# Altium PCB 在线升级仪_定制转接板V1.1_20231208(1).PcbDoc (part 1 of 2)
Units mil, origin at the board's own origin, x right, y up, seen from the top; angles counter-clockwise.
Board outline 6299.21 x 2165.35 mil, 2 copper layers (Top Layer, Bottom Layer); 38 components, 64 nets, 286 pads, 90 vias.
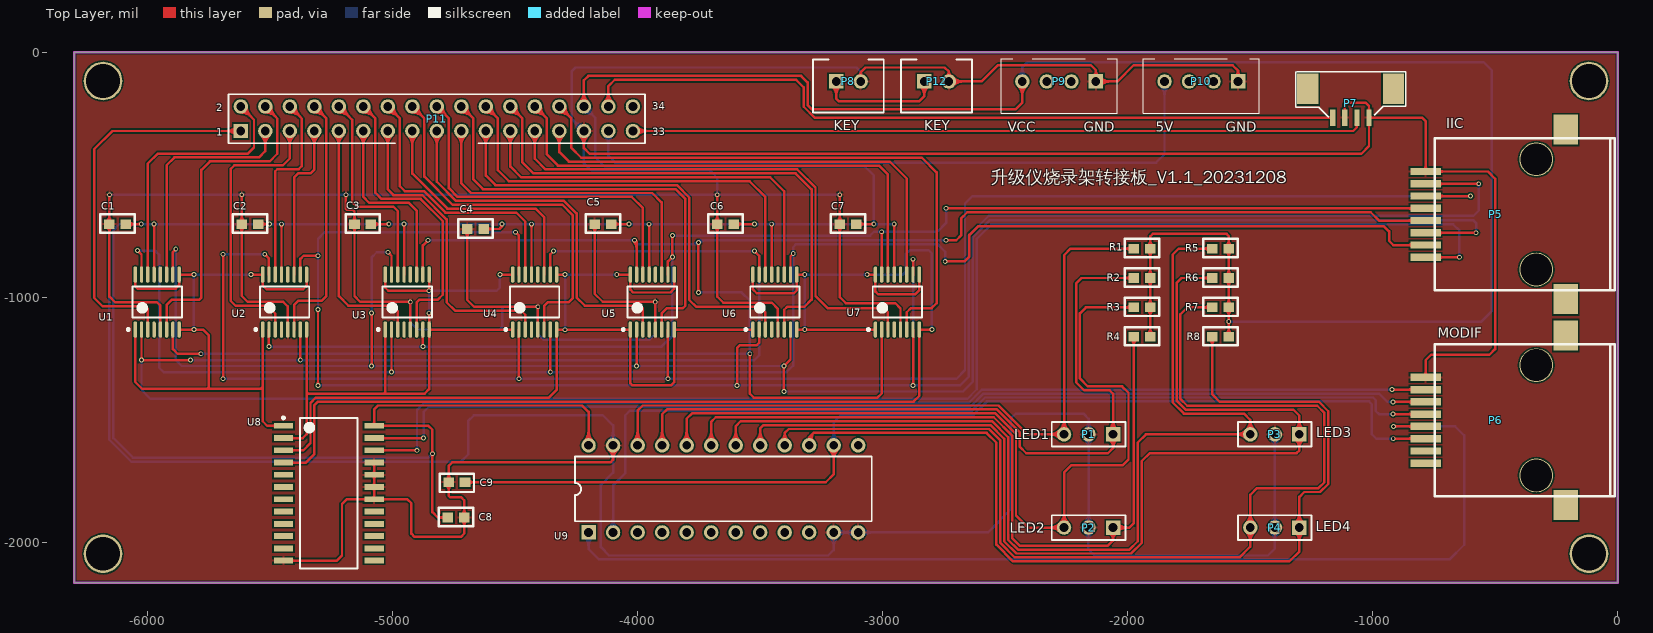
[diagram p0: Top Layer view]
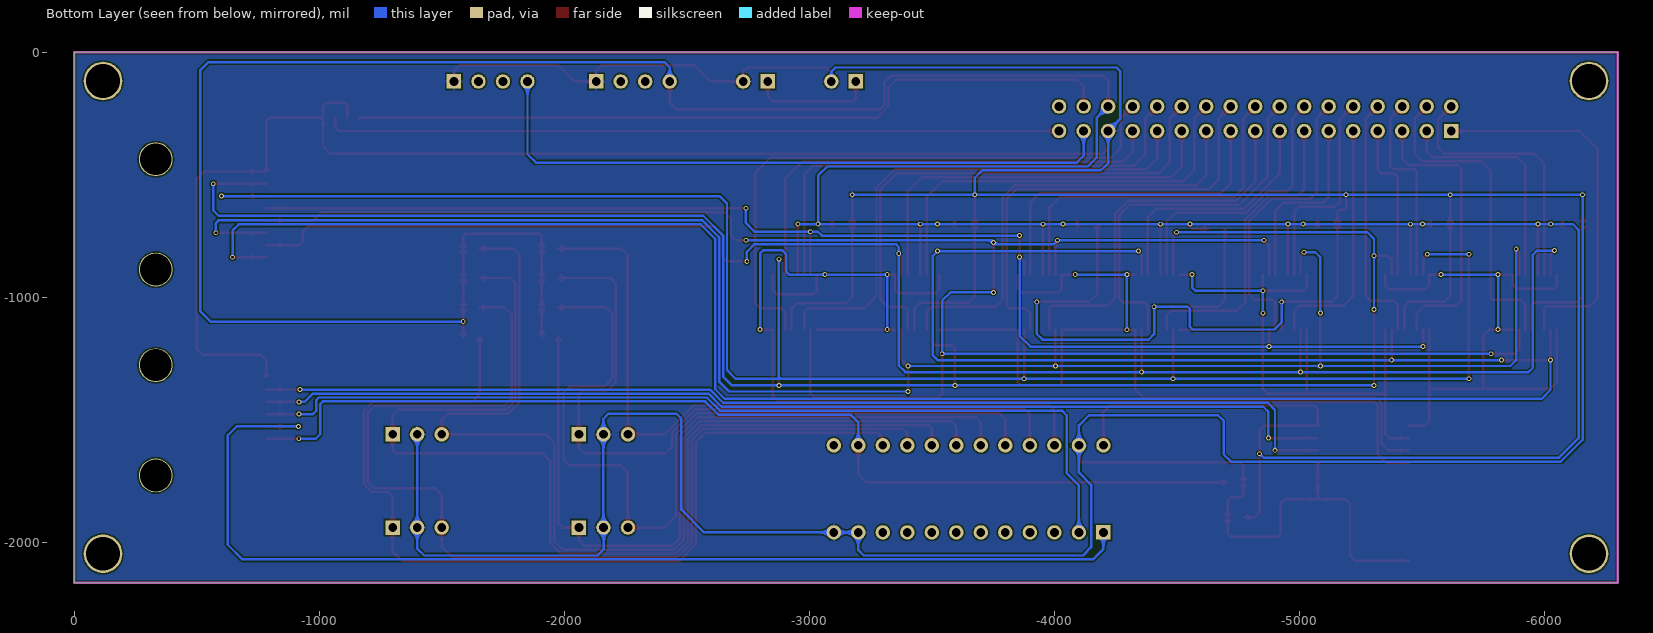
[diagram p1: Bottom Layer view, seen from below]

## Layer stack, top to bottom
Top Layer: signal copper 1.4
Dielectric: dielectric 12.6, FR-4, Dk 4.8
Bottom Layer: signal copper 1.4

## Board outline
-6299.21,-2165.35 -6299.21,0 0,0 0,-2165.35

## Design rules (kind name [scope] priority, off if disabled: settings)
Clearance [All] p1: gap=6
HoleSize [All] p1: absolutevalues=TRUE maxlimit=500 minlimit=1 maxpercent=80.000 minpercent=20.000
MinimumSolderMaskSliver [All] p1: minsoldermaskwidth=0
PolygonConnect [All] p1: connectstyle=Relief reliefconductorwidth=10 reliefentries=4 polygonreliefangle="90 Angle"
RoutingVias [All] p1: holewidth=11.81 width=19.68 viastyle="Through Hole" minholewidth=11.81 minwidth=19.68 maxholewidth=19.68 maxwidth=31.5
SilkscreenOverComponentPads [All] p1: minsilkscreentomaskgap=0
SolderMaskExpansion [All] p1: expansion=4
Width [All] p1: maxlimit=10 minlimit=6 preferedwidth=10
25 further rules are at their usual default settings.

## Components (designator, comment, footprint, x,y, rotation, side; value= is the part's Value field where it differs from the comment)
C1 "Cap" 0603 -6120,-700 r0 top
C2 "Cap" 0603 -5580,-700 r0 top
C3 "Cap" 0603 -5120,-700 r0 top
C4 "Cap" 0603 -4660,-720 r0 top
C5 "Cap" 0603 -4140,-700 r0 top
C6 "Cap" 0603 -3640,-700 r0 top
C7 "Cap" 0603 -3140,-700 r0 top
C8 "Cap Semi" 0603 -4739,-1897 r0 top
C9 "Cap Semi" 0603 -4739,-1757 r180 top
P1 "Header 3" HDR1X3 -2060,-1560 r180 top
P2 "Header 3" HDR1X3 -2060,-1940 r180 top
P3 "Header 3" HDR1X3 -1300,-1560 r180 top
P4 "Header 3" HDR1X3 -1300,-1940 r180 top
P5 "IIC" RJ45网络插座 -440,-660 r270 top
P6 "MODIF" RJ45网络插座 -440,-1500 r270 top
P7 "Header 4" 4pin_1.25mm -1100,-160 r90 top
P8 "升级头备用按键连接口" 2P座子 -3140,-120 r180 top
P9 "Header 4" 4P座子 -2280,-120 r180 top
P10 "Header 4" 4P座子 -1700,-120 r180 top
P11 "34P牛角座" "34P 牛角座" -4080,-280 r0 top
P12 "升级头备用按键连接口" 2P座子 -2780,-120 r180 top
R1 "Res1" 0603 -1940,-800 r0 top
R2 "Res1" 0603 -1940,-920 r0 top
R3 "Res1" 0603 -1940,-1040 r0 top
R4 "Res1" 0603 -1940,-1160 r0 top
R5 "Res1" 0603 -1620,-800 r0 top
R6 "Res1" 0603 -1620,-920 r0 top
R7 "Res1" 0603 -1620,-1040 r0 top
R8 "Res1" 0603 -1620,-1160 r0 top
U1 "TMUX1111" TMUX1111 -5960,-1020 r90 top
U2 "TMUX1111" TMUX1111 -5440,-1020 r90 top
U3 "TMUX1111" TMUX1111 -4940,-1020 r90 top
U4 "TMUX1111" TMUX1111 -4420,-1020 r90 top
U5 "TMUX1111" TMUX1111 -3940,-1020 r90 top
U6 "TMUX1111" TMUX1111 -3440,-1020 r90 top
U7 "TMUX1111" TMUX1111 -2940,-1020 r90 top
U8 "CD74HC154M" CD74HC154M -5260,-1800 r180 top
U9 "SN74ALS867ANT" SN74ALS867ANT -4200,-1960 r90 top

## Footprints (in the part's own frame and the unit in brackets; to place one, negate y for a bottom-side part, rotate by r counter-clockwise, add the part's x,y. Pads: shape width x height; smd on the part's side, far side on the other; paste and mask are expansions set on the pad)
2P座子 [mm]
  rect 1.5x1.5 hole 0.9: 1(1.27,0)
  round 1.5 hole 0.9: 2(-1.27,0)
  silkscreen extent -3.67,-2.27 3.67,3.2
4pin_1.25mm [mm] "贴片"
  rect 3.2x2.2 smd: 0(0.261,4.202) 0(0.261,-4.688)
  rect 1.7x0.54 smd: 1(-2.724,1.613) 2(-2.724,0.362) 3(-2.724,-0.889) 4(-2.724,-2.14)
  silkscreen extent -2.68,-5.97 2.03,5.46
4P座子 [mm]
  round 1.5 hole 0.9: 1(3.81,0) 2(1.27,0) 3(-1.27,0)
  rect 1.5x1.5 hole 0.9: 4(-3.81,0)
  silkscreen extent -6.01,-2.35 6.01,3.3
"34P 牛角座" [mm]
  rect 1.5x1.5 hole 0.9: 1(-39.089,-1.069)
  round 1.5 hole 0.9: 2(-39.089,1.471) 3(-36.549,-1.069) 4(-36.549,1.471) 5(-34.009,-1.069) 6(-34.009,1.471) 7(-31.469,-1.069) 8(-31.469,1.471) 9(-28.929,-1.069) 10(-28.929,1.471) 11(-26.389,-1.069) 12(-26.389,1.471) 13(-23.849,-1.069) 14(-23.849,1.471) 15(-21.309,-1.069) 16(-21.309,1.471) 17(-18.769,-1.069) 18(-18.769,1.471) 19(-16.229,-1.069) 20(-16.229,1.471) 21(-13.689,-1.069) 22(-13.689,1.471) 23(-11.149,-1.069) 24(-11.149,1.471) 25(-8.609,-1.069) 26(-8.609,1.471) 27(-6.069,-1.069) 28(-6.069,1.471) 29(-3.529,-1.069) 30(-3.529,1.471) 31(-0.989,-1.069) 32(-0.989,1.471) 33(1.551,-1.069) 34(1.551,1.471)
  silkscreen extent -40.36,-2.34 2.82,2.74
0603 [mm]
  rect 1.1x1 smd: 1(0.811,-0.048) 2(-0.889,-0.048)
  silkscreen extent -1.82,-0.94 1.74,0.97
CD74HC154M [mm] "SOP24"
  rect 2x0.6 smd: 1(4.701,-6.985) 2(4.701,-5.715) 3(4.701,-4.445) 4(4.701,-3.175) 5(4.701,-1.905) 6(4.701,-0.635) 7(4.701,0.635) 8(4.701,1.905) 9(4.701,3.175) 10(4.701,4.445) 11(4.701,5.715) 12(4.701,6.985) 13(-4.699,6.985) 14(-4.699,5.715) 15(-4.699,4.445) 16(-4.699,3.175) 17(-4.699,1.905) 18(-4.699,0.635) 19(-4.699,-0.635) 20(-4.699,-1.905) 21(-4.699,-3.175) 22(-4.699,-4.445) 23(-4.699,-5.715) 24(-4.699,-6.985)
  silkscreen extent -3,-7.93 4.83,7.8, body extent -3.8,-7.8 3.8,7.8, height 2.65
HDR1X3 [mm] "Connector; Header; 3 Position"
  rect 1.5x1.5 hole 0.9: 1(0,0)
  round 1.5 hole 0.9: 2(2.54,0) 3(5.08,0)
  silkscreen extent -1.27,-1.27 6.35,1.27
RJ45网络插座 [mm] "贴片8P"
  rect 3.12x2.54 smd: 0(-8.724,5.766) 0(8.846,5.766)
  round 3.5 hole 3.3: 0(-5.654,2.716) 0(5.776,2.716)
  rect 0.76x3.18 smd: 1(4.506,-8.754) 2(3.236,-8.754) 3(1.966,-8.754) 4(0.696,-8.754) 5(-0.574,-8.754) 6(-1.844,-8.754) 7(-3.114,-8.754) 8(-4.384,-8.754)
  silkscreen extent -7.81,-7.8 7.93,10.85
SN74ALS867ANT [mm]
  rect 1.5x1.5 hole 0.9: 1(0,0)
  round 1.5 hole 0.9: 2(0,-2.54) 3(0,-5.08) 4(0,-7.62) 5(0,-10.16) 6(0,-12.7) 7(0,-15.24) 8(0,-17.78) 9(0,-20.32) 10(0,-22.86) 11(0,-25.4) 12(0,-27.94) 13(9.02,-27.94) 14(9.02,-25.4) 15(9.02,-22.86) 16(9.02,-20.32) 17(9.02,-17.78) 18(9.02,-15.24) 19(9.02,-12.7) 20(9.02,-10.16) 21(9.02,-7.62) 22(9.02,-5.08) 23(9.02,-2.54) 24(9.02,0)
  silkscreen extent 1.16,-29.35 7.87,1.41
TMUX1111 [mm] "TSSOP-16"
  oval 1.7x0.35 smd: 1(-2.85,2.275) 2(-2.85,1.625) 3(-2.85,0.975) 4(-2.85,0.325) 5(-2.85,-0.325) 6(-2.85,-0.975) 7(-2.85,-1.625) 8(-2.85,-2.275) 9(2.85,-2.275) 10(2.85,-1.625) 11(2.85,-0.975) 12(2.85,-0.325) 13(2.85,0.325) 14(2.85,0.975) 15(2.85,1.625) 16(2.85,2.275)
  silkscreen extent -2.97,-2.55 1.6,3.12, body extent -2.25,-2.55 2.25,2.55, height 1.2

## Part data
C1 C2 C3 C4 C5 C6 C7: "Capacitor"
C8 C9: "Capacitor (Semiconductor SIM Model)"
P1 P2 P3 P4: "Header, 3-Pin"
P5 P6: library part "Header 8", "Header, 8-Pin"
P7 P9 P10: "Header, 4-Pin"
P8 P12: library part "Header 2", "Header, 2-Pin"
P11: library part "Header 17X2A", "Header, 17-Pin, Dual row"
R1 R2 R3 R4 R5 R6 R7 R8: "Resistor"
U1 U2 U3 U4 U5 U6 U7: library part Component_3
U8: "High Speed CMOS Logic 4-to-16 Line Decoder/Demultiplexer"
U9: library part Component_2

## Free pads (board coordinates)
  round 157.48 hole 137.8: 1(-6181.1,-2047.24) 1(-6181.1,-118.11) 1(-118.11,-2047.24) 1(-118.11,-118.11)

## Via types
v1: diameter 19.68, hole 11.81, Top Layer to Bottom Layer, 90 vias

## Nets (pads, with @x,y where several pads share a name; then routed paths per layer and width w, separated by ;. In a path a pad name is that pad's centre, name@x,y a point inside that pad or via, vN(x,y) a via of type N, cw(c..) or ccw(c..) an arc to the next point about the centre after c; other vN are vias at no path point)
5V: P10.1 P11.31 | length 2988.8
  Bottom Layer w10: P11.31@-4136.28,-339.43 cw(c-4178.15,-381.3) -4118.93,-381.3 cw(c-4059.72,-381.3) P11.31@-4101.59,-339.43 ; P11.31@-4129.21,-332.36 cw(c-4154.01,-357.16) -4118.93,-357.16 cw(c-4083.86,-357.16) P11.31@-4108.66,-332.36 ; P11.31@-4118.93,-322.08 -4118.93,-423.07 -4091,-451 -1884,-451 -1850,-417 P10.1@-1850,-120 ; P10.1@-1867.34,-137.34 cw(c-1909.21,-179.21) -1850,-179.21 cw(c-1790.79,-179.21) P10.1@-1832.66,-137.34 ; P10.1@-1860.27,-130.27 cw(c-1885.07,-155.07) -1850,-155.07 cw(c-1814.93,-155.07) P10.1@-1839.73,-130.27
AVDD: P6.1
CLK1: P6.2
GND: C1.2 C2.2 C3.2 C4.2 C5.2 C6.2 C7.2 C8.1 C9.1 P1.2 P2.2 P3.2 P4.2 P5.8 P6.8 P7.2 P7.4 P8.2 P9.4 P10.4 P11.29 P12.2 U1.5 U2.5 U3.5 U4.5 U5.5 U6.5 U7.5 U8.12 U8.18 U8.19 U8.20 U8.21 U9.11 U9.12 U9.23 | length 34263.1
  Top Layer w10: C1.2@-6165.38,-712.28 cw(c-6190.45,-737.35) -6155,-737.35 cw(c-6119.55,-737.35) C1.2@-6144.62,-712.28 ; C1.2@-6165.38,-691.51 ccw(c-6190.45,-666.45) -6155,-666.45 ccw(c-6119.55,-666.45) C1.2@-6144.62,-691.51 ; v1@-6158.42,-585.42 cw(c-6166.69,-593.69) -6155,-593.69 cw(c-6143.31,-593.69) v1@-6151.58,-585.42 ; v1(-6155,-582) C1.2@-6155,-701.9 -6155,-998 -6132,-1021 -5961,-1021 -5947.2,-1034.8 U1.5@-5947.2,-1132.2 ; C2.2@-5625.38,-712.28 cw(c-5650.45,-737.35) -5615,-737.35 cw(c-5579.55,-737.35) C2.2@-5604.62,-712.28 ; C2.2@-5625.38,-691.51 ccw(c-5650.45,-666.45) -5615,-666.45 ccw(c-5579.55,-666.45) C2.2@-5604.62,-691.51 ; v1@-5618.42,-585.42 cw(c-5626.69,-593.69) -5615,-593.69 cw(c-5603.31,-593.69) v1@-5611.58,-585.42 ; v1(-5615,-582) C2.2@-5615,-701.9 -5615,-995 -5591,-1019 -5446,-1019 -5427.2,-1037.8 U2.5@-5427.2,-1132.2 ; U8.12@-5445.08,-2075 -5227,-2075 -5206,-2054 -5206,-1844 -5187,-1825 U8.18@-5075,-1825 ; U8.12@-5412.7,-2079.82 cw(c-5401.08,-2091.44) -5401.08,-2075 cw(c-5401.08,-2058.56) U8.12@-5412.7,-2070.18 ; v1@-5193.42,-585.42 cw(c-5201.69,-593.69) -5190,-593.69 cw(c-5178.31,-593.69) v1@-5186.58,-585.42 ; v1(-5190,-582) -5190,-639 -5185,-644 -5162,-644 -5155,-651 C3.2@-5155,-701.9 -5155,-996 -5132,-1019 v1(-4927.2,-1019) U3.5@-4927.2,-1132.2 ; C3.2@-5165.38,-712.28 cw(c-5190.45,-737.35) -5155,-737.35 cw(c-5119.55,-737.35) C3.2@-5144.62,-712.28 ; C3.2@-5165.38,-691.51 ccw(c-5190.45,-666.45) -5155,-666.45 ccw(c-5119.55,-666.45) C3.2@-5144.62,-691.51 ; U8.18@-5107.38,-1829.82 ccw(c-5119,-1841.44) -5119,-1825 ccw(c-5119,-1808.56) U8.18@-5107.38,-1820.18 ; U8.18@-5079.82,-1820.18 ccw(c-5091.44,-1808.56) -5075,-1808.56 ccw(c-5058.56,-1808.56) U8.18@-5070.18,-1820.18 ; U8.19@-5079.82,-1779.82 cw(c-5091.44,-1791.44) -5075,-1791.44 cw(c-5058.56,-1791.44) U8.19@-5070.18,-1779.82 ; U8.19@-5079.82,-1770.18 ccw(c-5091.44,-1758.56) -5075,-1758.56 ccw(c-5058.56,-1758.56) U8.19@-5070.18,-1770.18 ; U8.20@-5079.82,-1729.82 cw(c-5091.44,-1741.44) -5075,-1741.44 cw(c-5058.56,-1741.44) U8.20@-5070.18,-1729.82 ; U8.20@-5079.82,-1720.18 ccw(c-5091.44,-1708.56) -5075,-1708.56 ccw(c-5058.56,-1708.56) U8.20@-5070.18,-1720.18 ; U8.21@-5079.82,-1679.82 cw(c-5091.44,-1691.44) -5075,-1691.44 cw(c-5058.56,-1691.44) U8.21@-5070.18,-1679.82 ; U8.21@-5075,-1675 U8.20@-5075,-1725 U8.19@-5075,-1775 U8.18@-5075,-1825 ; U8.18@-5042.62,-1829.82 cw(c-5031,-1841.44) -5031,-1825 cw(c-5031,-1808.56) U8.18@-5042.62,-1820.18 ; v1@-4930.63,-1015.58 cw(c-4938.9,-1007.31) -4938.9,-1019 cw(c-4938.9,-1030.69) -4930.63,-1022.42 cw(c-4938.9,-1030.69) -4927.2,-1030.69 cw(c-4915.51,-1030.69) v1@-4923.78,-1022.42 ; C9.1@-4781.31,-1765.49 cw(c-4806.38,-1790.55) -4770.93,-1790.55 cw(c-4735.48,-1790.55) C9.1@-4760.55,-1765.49 ; C9.1@-4781.31,-1744.72 ccw(c-4806.38,-1719.65) -4770.93,-1719.65 ccw(c-4735.48,-1719.65) C9.1@-4760.55,-1744.72 ; C8.1@-4717.45,-1909.28 cw(c-4742.52,-1934.35) -4707.07,-1934.35 cw(c-4671.62,-1934.35) C8.1@-4696.69,-1909.28 ; C8.1@-4717.45,-1888.51 ccw(c-4742.52,-1863.45) -4707.07,-1863.45 ccw(c-4671.62,-1863.45) C8.1@-4696.69,-1888.51 ; C4.2@-4705.38,-732.28 cw(c-4730.45,-757.35) -4695,-757.35 cw(c-4659.55,-757.35) C4.2@-4684.62,-732.28 ; C4.2@-4695,-721.9 -4695,-1011 -4667,-1039 -4407.2,-1039 U4.5@-4407.2,-1132.2 ; v1@-4410.42,-1035.58 cw(c-4418.69,-1027.31) -4418.69,-1039 cw(c-4418.69,-1050.69) -4410.42,-1042.42 cw(c-4418.2,-1050.2) -4407.2,-1050.2 ; -4407.2,-1051.18 cw(c-4394.81,-1051.18) v1@-4403.58,-1042.42 ; P11.29@-4236.28,-339.43 cw(c-4278.15,-381.3) -4218.93,-381.3 cw(c-4159.72,-381.3) P11.29@-4201.59,-339.43 ; P11.29@-4229.21,-332.36 cw(c-4254.01,-357.16) -4218.93,-357.16 cw(c-4183.86,-357.16) P11.29@-4208.66,-332.36 ; P11.29@-4218.93,-322.08 -4218.93,-392.07 -4196,-415 -1047,-415 -1015.74,-383.74 P7.4@-1015.74,-267.23 ; C5.2@-4185.38,-712.28 cw(c-4210.45,-737.35) -4175,-737.35 cw(c-4139.55,-737.35) C5.2@-4164.62,-712.28 ; C5.2@-4175,-701.9 -4175,-986 -4142,-1019 v1(-3928,-1019) -3928,-1131.41 U5.5@-3927.2,-1132.2 ; U9.23@-4117.11,-1622.46 cw(c-4156.59,-1663) -4100,-1663 ; U9.23@-4110.13,-1615.29 cw(c-4133.52,-1639.3) -4100,-1639.3 cw(c-4066.48,-1639.3) U9.23@-4089.87,-1615.29 ; U9.23@-4100,-1604.88 -4100,-1663 ; U9.23@-4082.89,-1622.46 ccw(c-4043.41,-1663) -4100,-1663 ; v1@-3931.42,-1015.58 cw(c-3939.69,-1007.31) -3939.69,-1019 cw(c-3939.69,-1030.69) -3931.42,-1022.42 cw(c-3939.69,-1030.69) -3928,-1030.69 cw(c-3916.31,-1030.69) v1@-3924.58,-1022.42 ; C6.2@-3685.38,-712.28 cw(c-3710.45,-737.35) -3675,-737.35 cw(c-3639.55,-737.35) C6.2@-3664.62,-712.28 ; C6.2@-3685.38,-691.51 ccw(c-3710.45,-666.45) -3675,-666.45 ccw(c-3639.55,-666.45) C6.2@-3664.62,-691.51 ; v1@-3678.42,-585.42 cw(c-3686.69,-593.69) -3675,-593.69 cw(c-3663.31,-593.69) v1@-3671.58,-585.42 ; v1(-3675,-582) C6.2@-3675,-701.9 -3675,-848 -3675,-998 -3650,-1023 -3452,-1023 -3427.2,-1047.8 U6.5@-3427.2,-1132.2 ; C7.2@-3185.38,-712.28 cw(c-3210.45,-737.35) -3175,-737.35 cw(c-3139.55,-737.35) C7.2@-3164.62,-712.28 ; C7.2@-3185.38,-691.51 ccw(c-3210.45,-666.45) -3175,-666.45 ccw(c-3139.55,-666.45) C7.2@-3164.62,-691.51 ; v1@-3178.42,-585.42 cw(c-3186.69,-593.69) -3175,-593.69 cw(c-3163.31,-593.69) v1@-3171.58,-585.42 ; v1(-3175,-582) C7.2@-3175,-701.9 -3175,-1000 -3150,-1025 -2948,-1025 -2927.2,-1045.8 U7.5@-2927.2,-1132.2 ; P8.2@-3099.55,-97.41 ccw(c-3105.64,-83) -3090,-83 ; P8.2@-3090,-120 -3090,-83 ; P8.2@-3080.45,-97.41 cw(c-3074.36,-83) -3090,-83 ; P12.2@-2741.12,-98.14 ccw(c-2750.35,-80) -2730,-80 ; P12.2@-2719.73,-130.27 cw(c-2694.93,-155.07) -2694.93,-120 cw(c-2694.93,-84.93) P12.2@-2719.73,-109.73 ; P12.2@-2718.88,-98.14 cw(c-2709.65,-80) -2730,-80 ; P12.2@-2712.66,-137.34 cw(c-2670.79,-179.21) -2670.79,-120 cw(c-2670.79,-60.79) P12.2@-2712.66,-102.66 ; P9.4@-2143.67,-99.63 ccw(c-2160.87,-74) -2130,-74 ; P9.4@-2119.73,-130.27 cw(c-2094.93,-155.07) -2094.93,-120 cw(c-2094.93,-84.93) P9.4@-2119.73,-109.73 ; P9.4@-2116.33,-99.63 cw(c-2099.13,-74) -2130,-74 ; P9.4@-2112.66,-137.34 cw(c-2070.79,-179.21) -2070.79,-120 cw(c-2070.79,-60.79) P9.4@-2112.66,-102.66 ; P10.4@-1562.9,-99.14 ccw(c-1577.2,-76) -1550,-76 ; P10.4@-1550,-120 -1550,-76 ; P10.4@-1537.1,-99.14 cw(c-1522.8,-76) -1550,-76 ; P7.2@-1118.22,-240.41 ccw(c-1127.83,-230.8) -1114.24,-230.8 ccw(c-1100.65,-230.8) P7.2@-1110.26,-240.41 ; P7.2@-1114.24,-267.23 -1114.24,-214.24 -1106,-206 -1030,-206 -1015.74,-220.26 P7.4@-1015.74,-267.23 ; P7.4@-1019.72,-294.05 cw(c-1029.33,-303.66) -1015.74,-303.66 cw(c-1002.15,-303.66) P7.4@-1011.76,-294.05 ; P7.4@-1019.72,-240.41 ccw(c-1029.33,-230.8) -1015.74,-230.8 ccw(c-1002.15,-230.8) P7.4@-1011.76,-240.41 ; P7.4@-1011.76,-271.21 cw(c-1002.15,-280.82) -1002.15,-267.23 cw(c-1002.15,-253.64) P7.4@-1011.76,-263.25 ; P6.8@-791.71,-1320.37 ccw(c-808.71,-1303.37) -784.66,-1303.37 ccw(c-760.61,-1303.37) P6.8@-777.62,-1320.37 ; P5.8@-791.71,-480.37 ccw(c-808.71,-463.37) -784.66,-463.37 ccw(c-760.61,-463.37) P5.8@-777.62,-480.37 ; P6.8@-784.66,-1327.42 -784.66,-1257.66 -762,-1235 -524,-1235 -501,-1212 -501,-517 -530.58,-487.42 P5.8@-784.66,-487.42 -784.66,-281.34 -798.77,-267.23 P7.4@-1015.74,-267.23 ; P5.8@-729.98,-494.46 cw(c-712.98,-511.46) -712.98,-487.42 cw(c-712.98,-463.37) P5.8@-729.98,-480.37 ; U8.18@-5075,-1825 -4939,-1825 -4923,-1841 -4923,-1965 -4910,-1978 -4721,-1978 -4707.07,-1964.07 C8.1@-4707.07,-1898.9 -4707.07,-1828.93 -4720,-1816 -4765,-1816 -4770.93,-1810.07 C9.1@-4770.93,-1755.1 -4770.93,-1689 -4755.93,-1674 -4111,-1674 -4100,-1663 ; -3090,-83 -3070,-63 -2747,-63 -2730,-80 ; -2730,-80 P12.2@-2730,-120 -2596,-120 -2529,-53 -2151,-53 -2130,-74 ; -2130,-74 P9.4@-2130,-120 -2042,-120 -1976,-54 -1572,-54 -1550,-76
  Bottom Layer w10: v1@-6158.42,-585.42 cw(c-6166.69,-593.69) -6155,-593.69 cw(c-6143.31,-593.69) -6151.58,-585.42 cw(c-6143.31,-593.69) -6143.31,-582 cw(c-6143.31,-570.31) v1@-6151.58,-578.58 ; v1@-5618.42,-585.42 ccw(c-5626.69,-593.69) -5626.69,-582 ccw(c-5626.69,-570.31) v1@-5618.42,-578.58 ; v1@-5611.58,-585.42 cw(c-5603.31,-593.69) -5603.31,-582 cw(c-5603.31,-570.31) v1@-5611.58,-578.58 ; v1@-5193.42,-585.42 ccw(c-5201.69,-593.69) -5201.69,-582 ccw(c-5201.69,-570.31) v1@-5193.42,-578.58 ; v1@-5186.58,-585.42 cw(c-5178.31,-593.69) -5178.31,-582 cw(c-5178.31,-570.31) v1@-5186.58,-578.58 ; v1@-4930.63,-1022.42 cw(c-4938.9,-1030.69) -4927.2,-1030.69 cw(c-4915.51,-1030.69) v1@-4923.78,-1022.42 ; v1(-4927.2,-1019) -4927.2,-1103 -4898.2,-1132 -4564,-1132 -4553,-1121 -4553,-1049 -4543,-1039 v1(-4407,-1039) -4407,-1151 -4385,-1173 -3951,-1173 -3928,-1150 v1(-3928,-1019) ; v1@-4410.42,-1035.58 cw(c-4418.69,-1027.31) -4418.69,-1039 cw(c-4418.69,-1050.69) -4410.42,-1042.42 cw(c-4418.69,-1050.69) -4407,-1050.69 cw(c-4395.31,-1050.69) v1@-4403.58,-1042.42 ; P11.29@-4243.46,-322.08 ccw(c-4302.68,-322.08) -4260.8,-280.21 ccw(c-4218.93,-238.34) P11.29@-4218.93,-297.56 ; P11.29@-4236.28,-339.43 cw(c-4275.57,-378.72) -4220,-378.72 ; P11.29@-4233.46,-322.08 ccw(c-4268.53,-322.08) -4243.73,-297.28 ccw(c-4218.93,-272.48) P11.29@-4218.93,-307.56 ; P11.29@-4229.21,-332.36 cw(c-4251.43,-354.58) -4220,-354.58 ; -4220,-383.87 cw(c-4157.14,-383.87) P11.29@-4201.59,-339.43 ; -4220,-359.73 cw(c-4181.29,-359.73) P11.29@-4208.66,-332.36 ; U9.23@-4117.34,-1622.23 cw(c-4159.21,-1664.1) -4100,-1664.1 cw(c-4040.79,-1664.1) U9.23@-4082.66,-1622.23 ; U9.23@-4117.34,-1587.54 ccw(c-4159.21,-1545.67) -4100,-1545.67 ccw(c-4040.79,-1545.67) U9.23@-4082.66,-1587.54 ; U9.23@-4110.27,-1615.15 cw(c-4135.07,-1639.95) -4100,-1639.95 cw(c-4064.93,-1639.95) U9.23@-4089.73,-1615.15 ; U9.23@-4110.27,-1594.61 ccw(c-4135.07,-1569.81) -4100,-1569.81 ccw(c-4064.93,-1569.81) U9.23@-4089.73,-1594.61 ; v1@-3931.42,-1022.42 cw(c-3939.69,-1030.69) -3928,-1030.69 cw(c-3916.31,-1030.69) v1@-3924.58,-1022.42 ; v1@-3678.42,-585.42 ccw(c-3686.69,-593.69) -3686.69,-582 ccw(c-3686.69,-570.31) -3678.42,-578.58 ccw(c-3686.69,-570.31) -3675,-570.31 ccw(c-3663.31,-570.31) -3671.58,-578.58 ccw(c-3663.31,-570.31) -3663.31,-582 ccw(c-3663.31,-593.69) v1@-3671.58,-585.42 ; U9.11@-3217.34,-1977.34 cw(c-3259.21,-2019.21) -3200,-2019.21 cw(c-3140.79,-2019.21) -3182.66,-1977.34 cw(c-3140.79,-2019.21) -3140.79,-1960 cw(c-3140.79,-1900.79) U9.11@-3182.66,-1942.66 ; U9.11@-3210.27,-1970.27 cw(c-3235.07,-1995.07) -3200,-1995.07 cw(c-3164.93,-1995.07) -3189.73,-1970.27 cw(c-3164.93,-1995.07) -3164.93,-1960 cw(c-3164.93,-1924.93) U9.11@-3189.73,-1949.73 ; v1@-3178.42,-585.42 ccw(c-3186.69,-593.69) -3186.69,-582 ccw(c-3186.69,-570.31) v1@-3178.42,-578.58 ; v1(-3175,-582) v1(-3675,-582) ; U9.12@-3117.34,-1977.34 ccw(c-3159.21,-2019.21) -3159.21,-1960 ccw(c-3159.21,-1900.79) U9.12@-3117.34,-1942.66 ; U9.12@-3110.27,-1970.27 ccw(c-3135.07,-1995.07) -3135.07,-1960 ccw(c-3135.07,-1924.93) U9.12@-3110.27,-1949.73 ; P8.2@-3101.12,-98.14 ccw(c-3110.35,-80) -3090,-80 ; P8.2@-3090,-120 -3090,-80 ; U9.12@-3089.73,-1970.27 cw(c-3064.93,-1995.07) -3064.93,-1960 cw(c-3064.93,-1924.93) U9.12@-3089.73,-1949.73 ; U9.12@-3082.66,-1977.34 cw(c-3040.79,-2019.21) -3040.79,-1960 cw(c-3040.79,-1900.79) U9.12@-3082.66,-1942.66 ; P8.2@-3078.88,-98.14 cw(c-3069.65,-80) -3090,-80 ; P2.2@-2177.34,-1957.34 cw(c-2214.39,-1994.39) -2162,-1994.39 ; P2.2@-2177.34,-1922.66 ccw(c-2219.21,-1880.79) -2160,-1880.79 ccw(c-2100.79,-1880.79) P2.2@-2142.66,-1922.66 ; P1.2@-2177.34,-1577.34 cw(c-2219.21,-1619.21) -2160,-1619.21 cw(c-2100.79,-1619.21) P1.2@-2142.66,-1577.34 ; P1.2@-2177.34,-1542.66 ccw(c-2219.21,-1500.79) -2160,-1500.79 ccw(c-2100.79,-1500.79) P1.2@-2142.66,-1542.66 ; P2.2@-2170.27,-1950.27 cw(c-2190.24,-1970.24) -2162,-1970.24 ; P2.2@-2170.27,-1929.73 ccw(c-2195.07,-1904.93) -2160,-1904.93 ccw(c-2124.93,-1904.93) P2.2@-2149.73,-1929.73 ; P1.2@-2170.27,-1570.27 cw(c-2195.07,-1595.07) -2160,-1595.07 cw(c-2124.93,-1595.07) P1.2@-2149.73,-1570.27 ; P1.2@-2170.27,-1549.73 ccw(c-2195.07,-1524.93) -2160,-1524.93 ccw(c-2124.93,-1524.93) P1.2@-2149.73,-1549.73 ; -2162,-2004.04 cw(c-2095.96,-2004.04) P2.2@-2142.66,-1957.34 ; -2162,-1979.9 cw(c-2120.1,-1979.9) P2.2@-2149.73,-1950.27 ; P4.2@-1417.34,-1957.34 cw(c-1459.21,-1999.21) -1400,-1999.21 cw(c-1340.79,-1999.21) P4.2@-1382.66,-1957.34 ; P4.2@-1417.34,-1922.66 ccw(c-1459.21,-1880.79) -1400,-1880.79 ccw(c-1340.79,-1880.79) P4.2@-1382.66,-1922.66 ; P3.2@-1417.34,-1577.34 cw(c-1459.21,-1619.21) -1400,-1619.21 cw(c-1340.79,-1619.21) P3.2@-1382.66,-1577.34 ; P4.2@-1410.27,-1950.27 cw(c-1435.07,-1975.07) -1400,-1975.07 cw(c-1364.93,-1975.07) P4.2@-1389.73,-1950.27 ; P4.2@-1410.27,-1929.73 ccw(c-1435.07,-1904.93) -1400,-1904.93 ccw(c-1364.93,-1904.93) P4.2@-1389.73,-1929.73 ; P3.2@-1410.27,-1570.27 cw(c-1435.07,-1595.07) -1400,-1595.07 cw(c-1364.93,-1595.07) P3.2@-1389.73,-1570.27 ; P3.2@-1400,-1560 P4.2@-1400,-1940 -1400,-2025 -1429,-2054 -2136,-2054 -2162,-2028 -2162,-1942 P2.2@-2160,-1940 P1.2@-2160,-1560 -2160,-1496 -2181,-1475 -2457,-1475 -2478,-1496 -2478,-1867 -2571,-1960 U9.12@-3100,-1960 U9.11@-3200,-1960 -3200,-2032 -3222,-2054 -4116,-2054 -4150,-2020 -4150,-1766 -4100,-1716 U9.23@-4100,-1604.88 -4100,-1523 -4141,-1482 -4668,-1482 -4690,-1504 -4690,-1641 -4720,-1671 -6066,-1671 -6155,-1582 v1(-6155,-582) v1(-5615,-582) v1(-5190,-582) v1(-3675,-582) ; v1(-3675,-582) -3675,-513 -3705,-483 -4189,-483 -4220,-452 -4220,-323.15 P11.29@-4218.93,-322.08 -4268,-273.02 -4268,-78 -4253,-63 -3107,-63 -3090,-80
GPIO56: C9.2 P6.3 U9.14 | length 4741.2
  Top Layer w10: C9.2@-4704,-1755.1 -3232.1,-1755.1 -3200,-1723 U9.14@-3200,-1604.88 ; C9.2@-4691.65,-1765.49 cw(c-4666.58,-1790.55) -4666.58,-1755.1 cw(c-4666.58,-1719.65) C9.2@-4691.65,-1744.72 ; U9.14@-3217.34,-1622.23 cw(c-3259.21,-1664.1) -3200,-1664.1 cw(c-3140.79,-1664.1) U9.14@-3182.66,-1622.23 ; U9.14@-3210.27,-1615.15 cw(c-3235.07,-1639.95) -3200,-1639.95 cw(c-3164.93,-1639.95) U9.14@-3189.73,-1615.15 ; v1(-916.58,-1577.42) P6.3@-784.66,-1577.42 ; v1@-913.16,-1580.84 cw(c-904.89,-1589.11) -904.89,-1577.42 cw(c-904.89,-1565.73) v1@-913.16,-1573.99 ; P6.3@-839.34,-1584.46 ccw(c-856.35,-1601.46) -856.35,-1577.42 ccw(c-856.35,-1553.37) P6.3@-839.34,-1570.37
  Bottom Layer w10: U9.14@-3217.34,-1587.54 ccw(c-3259.21,-1545.67) -3200,-1545.67 ccw(c-3140.79,-1545.67) U9.14@-3182.66,-1587.54 ; U9.14@-3210.27,-1594.61 ccw(c-3235.07,-1569.81) -3200,-1569.81 ccw(c-3164.93,-1569.81) U9.14@-3189.73,-1594.61 ; U9.14@-3200,-1604.88 -3200,-1511 -3168,-1479 -2628.49,-1479 -2574.91,-1425.42 -1015.58,-1425.42 -1004,-1437 -1004,-1559.42 -986,-1577.42 v1(-916.58,-1577.42) ; v1@-920.01,-1580.84 ccw(c-928.27,-1589.11) -928.27,-1577.42 ccw(c-928.27,-1565.73) v1@-920.01,-1573.99
GPIO57: P6.4 U9.1 | length 4806.2
  Top Layer w10: v1(-915.42,-1527.42) P6.4@-784.66,-1527.42 ; v1@-911.99,-1530.84 cw(c-903.73,-1539.11) -903.73,-1527.42 cw(c-903.73,-1515.73) v1@-911.99,-1523.99 ; P6.4@-839.34,-1534.46 ccw(c-856.35,-1551.46) -856.35,-1527.42 ccw(c-856.35,-1503.37) P6.4@-839.34,-1520.37
  Bottom Layer w10: U9.1@-4217.34,-1977.34 cw(c-4259.21,-2019.21) -4200,-2019.21 cw(c-4140.79,-2019.21) U9.1@-4182.66,-1977.34 ; U9.1@-4210.27,-1970.27 cw(c-4235.07,-1995.07) -4200,-1995.07 cw(c-4164.93,-1995.07) U9.1@-4189.73,-1970.27 ; U9.1@-4200,-1940 -4200,-2028 -4158,-2070 -687,-2070 -627,-2010 -627,-1564 -663.58,-1527.42 v1(-915.42,-1527.42) ; v1@-911.99,-1530.84 cw(c-903.73,-1539.11) -903.73,-1527.42 cw(c-903.73,-1515.73) v1@-911.99,-1523.99
GPIO58: P6.5 U9.2 | length 4070.7
  Top Layer w10: v1(-917.42,-1477.42) P6.5@-784.66,-1477.42 ; v1@-913.99,-1480.84 cw(c-905.73,-1489.11) -905.73,-1477.42 cw(c-905.73,-1465.73) v1@-913.99,-1473.99 ; P6.5@-839.34,-1484.46 ccw(c-856.35,-1501.46) -856.35,-1477.42 ccw(c-856.35,-1453.37) P6.5@-839.34,-1470.37
  Bottom Layer w10: U9.2@-4117.34,-1942.66 ccw(c-4159.21,-1900.79) -4100,-1900.79 ccw(c-4040.79,-1900.79) U9.2@-4082.66,-1942.66 ; U9.2@-4110.27,-1949.73 ccw(c-4135.07,-1924.93) -4100,-1924.93 ccw(c-4064.93,-1924.93) U9.2@-4089.73,-1949.73 ; U9.2@-4100,-1960 -4100,-1768 -4050,-1718 -4050,-1482 -4031,-1463 -2635.12,-1463 -2581.54,-1409.42 -998.58,-1409.42 -988,-1420 -988,-1464 -974.58,-1477.42 v1(-917.42,-1477.42) ; v1@-920.84,-1480.84 ccw(c-929.11,-1489.11) -929.11,-1477.42 ccw(c-929.11,-1465.73) v1@-920.84,-1473.99
GPIO59: P6.6 U8.23 | length 4579.4
  Top Layer w10: U8.23@-5075,-1575 v1(-4873,-1575) ; U8.23@-5042.62,-1579.82 cw(c-5031,-1591.44) -5031,-1575 cw(c-5031,-1558.56) U8.23@-5042.62,-1570.18 ; v1@-4876.42,-1578.42 ccw(c-4884.69,-1586.69) -4884.69,-1575 ccw(c-4884.69,-1563.31) v1@-4876.42,-1571.58 ; v1(-918.42,-1427.42) P6.6@-784.66,-1427.42 ; v1@-914.99,-1430.84 cw(c-906.73,-1439.11) -906.73,-1427.42 cw(c-906.73,-1415.73) v1@-914.99,-1423.99 ; P6.6@-839.34,-1434.46 ccw(c-856.35,-1451.46) -856.35,-1427.42 ccw(c-856.35,-1403.37) P6.6@-839.34,-1420.37
  Bottom Layer w10: v1@-4876.42,-1571.58 ccw(c-4884.69,-1563.31) -4873,-1563.31 ccw(c-4861.31,-1563.31) v1@-4869.58,-1571.58 ; v1(-4873,-1575) -4873,-1468 -4852,-1447 -2641.75,-1447 -2588.16,-1393.42 -974.58,-1393.42 -940.58,-1427.42 v1(-918.42,-1427.42) ; v1@-921.84,-1430.84 ccw(c-930.11,-1439.11) -930.11,-1427.42 ccw(c-930.11,-1415.73) v1@-921.84,-1423.99
GPIO60: P6.7 U8.22 | length 4627.2
  Top Layer w10: U8.22@-5075,-1625 v1(-4900,-1625) ; U8.22@-5042.62,-1629.82 cw(c-5031,-1641.44) -5031,-1625 cw(c-5031,-1608.56) U8.22@-5042.62,-1620.18 ; v1@-4903.42,-1628.42 ccw(c-4911.69,-1636.69) -4911.69,-1625 ccw(c-4911.69,-1613.31) v1@-4903.42,-1621.58 ; v1@-922,-1377 v1(-921.58,-1377.42) P6.7@-784.66,-1377.42 ; v1@-918.16,-1380.84 cw(c-909.89,-1389.11) -909.89,-1377.42 cw(c-909.89,-1365.73) v1@-918.16,-1373.99 ; P6.7@-839.34,-1384.46 ccw(c-856.35,-1401.46) -856.35,-1377.42 ccw(c-856.35,-1353.37) P6.7@-839.34,-1370.37
  Bottom Layer w10: v1@-4903.42,-1621.58 ccw(c-4911.69,-1613.31) -4900,-1613.31 ccw(c-4888.31,-1613.31) v1@-4896.58,-1621.58 ; v1(-4900,-1625) -4900,-1460 -4871,-1431 -2648.37,-1431 -2594.79,-1377.42 v1(-921.58,-1377.42) ; v1@-925.01,-1380.84 ccw(c-933.27,-1389.11) -933.27,-1377.42 ccw(c-933.27,-1365.73) v1@-925.01,-1373.99
IN1: U1.1 U1.8 U1.9 U1.16 U2.1 U2.9 U2.16 U8.1 | length 2867.3
  Top Layer w10: U1.1@-6049.57,-1132.2 -6049.57,-1345.43 -6021,-1374 -5757,-1374 ; U1.16@-6049.57,-907.8 -6049.57,-955.43 -6040,-965 -5885,-965 -5870.43,-950.43 U1.9@-5870.43,-907.8 v1(-5810.2,-907.8) ; U1.8@-5870.43,-1132.2 -5772.8,-1132.2 -5749,-1156 -5749,-1366 -5757,-1374 ; -5822.18,-1132.2 ccw(c-5822.18,-1119.82) v1@-5813.42,-1128.58 ; -5821.2,-1132.2 cw(c-5821.2,-1143.2) v1@-5813.42,-1135.42 ; v1@-5813.63,-911.22 ccw(c-5821.9,-919.49) -5821.9,-907.8 ccw(c-5821.9,-896.1) v1@-5813.63,-904.37 ; v1@-5806.58,-1135.42 cw(c-5798.8,-1143.2) -5798.8,-1132.2 ; v1@-5806.58,-1128.58 ccw(c-5797.81,-1119.82) -5797.81,-1132.2 ; v1(-5576.8,-907.8) U2.16@-5529.57,-907.8 -5529.57,-952.43 -5514,-968 -5364,-968 -5350.43,-954.43 U2.9@-5350.43,-907.8 ; v1@-5573.37,-911.22 cw(c-5565.1,-919.49) -5565.1,-907.8 cw(c-5565.1,-896.1) v1@-5573.37,-904.37 ; U2.1@-5529.57,-1132.2 -5529.57,-1365 ; U8.1@-5477.45,-1529.82 ccw(c-5489.08,-1541.44) -5489.08,-1525 ccw(c-5489.08,-1508.56) U8.1@-5477.45,-1520.18 ; U8.1@-5445.08,-1525 -5511,-1525 -5529.57,-1506.43 -5529.57,-1365 ; -5757,-1374 -5538.57,-1374 -5529.57,-1365
  Bottom Layer w10: v1@-5813.63,-911.22 cw(c-5821.9,-919.49) -5810.2,-919.49 cw(c-5798.51,-919.49) -5806.78,-911.22 cw(c-5798.51,-919.49) -5798.51,-907.8 cw(c-5798.51,-896.1) v1@-5806.78,-904.37 ; v1@-5813.42,-1128.58 ccw(c-5821.2,-1120.8) -5810.2,-1120.8 ; v1@-5810.2,-1131.8 v1(-5810.2,-907.8) v1(-5576.8,-907.8) ; -5810.2,-1119.82 ccw(c-5797.81,-1119.82) v1@-5806.58,-1128.58 ; v1@-5580.22,-911.22 ccw(c-5588.49,-919.49) -5588.49,-907.8 ccw(c-5588.49,-896.1) v1@-5580.22,-904.37
  other v1: -5810,-1132
IN2: U2.8 U3.1 U3.8 U3.9 U3.16 U4.1 U4.16 U8.2 | length 2916.4
  Top Layer w10: U8.2@-5445.08,-1575 -5366,-1575 -5350.43,-1559.43 -5350.43,-1387 ; U8.2@-5412.7,-1579.82 cw(c-5401.08,-1591.44) -5401.08,-1575 cw(c-5401.08,-1558.56) U8.2@-5412.7,-1570.18 ; U2.8@-5350.43,-1132.2 -5350.43,-1387 ; U3.1@-5029.57,-1132.2 -5029.57,-1386.57 -5037,-1394 ; U3.16@-5029.57,-907.8 -5029.57,-961.43 -5017,-974 v1(-4850.43,-974) U3.9@-4850.43,-907.8 ; v1@-4853.86,-1068.86 cw(c-4862.12,-1077.12) -4850.43,-1077.12 cw(c-4838.74,-1077.12) v1@-4847.01,-1068.86 ; v1@-4853.86,-977.42 ccw(c-4862.12,-985.69) -4862.12,-974 ccw(c-4862.12,-962.31) -4853.86,-970.58 ccw(c-4862.12,-962.31) -4850.43,-962.31 ccw(c-4838.74,-962.31) v1@-4847.01,-970.58 ; v1(-4850.43,-1065.43) U3.8@-4850.43,-1132.2 ; v1(-4561.8,-907.8) U4.16@-4509.57,-907.8 ; v1@-4558.37,-911.22 cw(c-4550.1,-919.49) -4550.1,-907.8 cw(c-4550.1,-896.1) v1@-4558.37,-904.37 ; U4.1@-4509.57,-1132.2 U3.8@-4850.43,-1132.2 ; -5350.43,-1387 -5343.43,-1394 -5037,-1394 ; -5037,-1394 -4869,-1394 -4850.43,-1375.43 U3.8@-4850.43,-1132.2
  Bottom Layer w10: v1@-4853.86,-1062.01 ccw(c-4862.12,-1053.74) -4850.43,-1053.74 ccw(c-4838.74,-1053.74) v1@-4847.01,-1062.01 ; v1@-4853.86,-977.42 cw(c-4862.12,-985.69) -4850.43,-985.69 cw(c-4838.74,-985.69) -4847.01,-977.42 cw(c-4838.74,-985.69) -4838.74,-974 cw(c-4838.74,-962.31) v1@-4847.01,-970.58 ; v1(-4850.43,-1065.43) v1(-4850.43,-974) -4575,-974 -4563,-962 -4563,-909 v1(-4561.8,-907.8) ; -4563,-922.39 cw(c-4547.2,-922.39) v1@-4558.37,-911.22
IN3: U4.8 U4.9 U5.1 U5.8 U5.9 U5.16 U6.1 U8.3 | length 3796.5
  Top Layer w10: U8.3@-5445.08,-1625 -5364,-1625 -5334.43,-1595.43 -5334.43,-1431.43 -5313,-1410 -4362,-1410 -4330.43,-1378.43 U4.8@-4330.43,-1132.2 U5.1@-4029.57,-1132.2 -4029.57,-1351.43 -4021,-1360 -3864,-1360 -3850.43,-1346.43 U5.8@-3850.43,-1132.2 U6.1@-3529.57,-1132.2 ; U8.3@-5412.7,-1629.82 cw(c-5401.08,-1641.44) -5401.08,-1625 cw(c-5401.08,-1608.56) U8.3@-5412.7,-1620.18 ; U4.9@-4330.43,-907.8 v1(-4295.8,-907.8) ; -4309.41,-1132.2 cw(c-4309.41,-1146.61) v1@-4299.22,-1136.42 ; v1@-4299.22,-911.22 ccw(c-4307.49,-919.49) -4307.49,-907.8 ccw(c-4307.49,-896.1) v1@-4299.22,-904.37 ; v1@-4292.37,-1136.42 cw(c-4282.18,-1146.61) -4282.18,-1132.2 ; v1(-4084.8,-907.8) U5.16@-4029.57,-907.8 -4029.57,-969.43 -4018,-981 -3866,-981 -3850.43,-965.43 U5.9@-3850.43,-907.8 ; v1@-4081.37,-911.22 cw(c-4073.1,-919.49) -4073.1,-907.8 cw(c-4073.1,-896.1) v1@-4081.37,-904.37
  Bottom Layer w10: v1@-4299.22,-1129.58 ccw(c-4307.49,-1121.31) -4295.8,-1121.31 ccw(c-4284.1,-1121.31) v1@-4292.37,-1129.58 ; v1@-4299.22,-911.22 cw(c-4307.49,-919.49) -4295.8,-919.49 cw(c-4284.1,-919.49) -4292.37,-911.22 cw(c-4284.1,-919.49) -4284.1,-907.8 cw(c-4284.1,-896.1) v1@-4292.37,-904.37 ; v1(-4295.8,-1133) v1(-4295.8,-907.8) v1@-4085.2,-907.8 ; v1@-4088.22,-911.22 ccw(c-4096.49,-919.49) -4096.49,-907.8 ccw(c-4096.49,-896.1) v1@-4088.22,-904.37
IN4: U6.8 U6.9 U6.16 U7.1 U7.8 U7.9 U7.16 U8.4 | length 5543.2
  Top Layer w10: U8.4@-5445.08,-1675 -5353,-1675 -5318.43,-1640.43 -5318.43,-1440.43 -5304,-1426 -2874,-1426 -2850.43,-1402.43 U7.8@-2850.43,-1132.2 v1(-2799,-1132.2) ; U8.4@-5412.7,-1679.82 cw(c-5401.08,-1691.44) -5401.08,-1675 cw(c-5401.08,-1658.56) U8.4@-5412.7,-1670.18 ; U6.16@-3529.57,-907.8 -3529.57,-968.43 -3514,-984 -3362,-984 -3350.43,-972.43 U6.9@-3350.43,-907.8 v1(-3318,-907.8) ; U6.8@-3350.43,-1132.2 U7.1@-3029.57,-1132.2 ; -3330.18,-1132.2 ccw(c-3330.18,-1119.82) v1@-3321.42,-1128.58 ; -3329.2,-1132.2 cw(c-3329.2,-1143.2) v1@-3321.42,-1135.42 ; v1@-3321.42,-911.22 ccw(c-3329.69,-919.49) -3329.69,-907.8 ccw(c-3329.69,-896.1) v1@-3321.42,-904.37 ; v1@-3314.58,-1135.42 cw(c-3306.8,-1143.2) -3306.8,-1132.2 ; v1@-3314.58,-1128.58 ccw(c-3305.81,-1119.82) -3305.81,-1132.2 ; v1(-3063.2,-907.8) U7.16@-3029.57,-907.8 -3029.57,-977.43 -3018,-989 -2868,-989 -2850.43,-971.43 U7.9@-2850.43,-907.8 ; v1@-3059.78,-911.22 cw(c-3051.51,-919.49) -3051.51,-907.8 cw(c-3051.51,-896.1) v1@-3059.78,-904.37 ; v1@-2802.42,-1135.63 ccw(c-2810.69,-1143.9) -2810.69,-1132.2 ccw(c-2810.69,-1120.51) v1@-2802.42,-1128.78
  Bottom Layer w10: v1@-3321.42,-1128.58 ccw(c-3329.69,-1120.31) -3318,-1120.31 ccw(c-3306.31,-1120.31) v1@-3314.58,-1128.58 ; v1@-3321.42,-911.22 cw(c-3329.69,-919.49) -3318,-919.49 cw(c-3306.31,-919.49) -3314.58,-911.22 cw(c-3306.31,-919.49) -3306.31,-907.8 cw(c-3306.31,-896.1) v1@-3314.58,-904.37 ; v1(-3318,-1132) v1(-3318,-907.8) v1(-3063.2,-907.8) -2917.8,-907.8 -2905,-895 -2905,-824 -2890,-809 -2811,-809 -2799,-821 v1(-2799,-1132.2) ; v1@-3066.63,-911.22 ccw(c-3074.9,-919.49) -3074.9,-907.8 ccw(c-3074.9,-896.1) v1@-3066.63,-904.37 ; v1@-3059.78,-911.22 cw(c-3051.51,-919.49) -3051.51,-907.8 cw(c-3051.51,-896.1) v1@-3059.78,-904.37 ; v1@-2802.42,-1128.78 ccw(c-2810.69,-1120.51) -2799,-1120.51 ccw(c-2787.31,-1120.51) v1@-2795.58,-1128.78
KEY1: P8.1 P12.1 | length 797.5
  Top Layer w10: P8.1@-3207.34,-137.34 cw(c-3249.21,-179.21) -3190,-179.21 cw(c-3130.79,-179.21) P8.1@-3172.66,-137.34 ; P8.1@-3200.27,-130.27 cw(c-3225.07,-155.07) -3190,-155.07 cw(c-3154.93,-155.07) P8.1@-3179.73,-130.27 ; P8.1@-3190,-120 -3190,-189 -3178,-201 -2852,-201 -2830,-179 ; P12.1@-2847.3,-137.39 cw(c-2888.69,-179) -2830,-179 ; P12.1@-2840.25,-130.3 cw(c-2864.76,-154.94) -2830,-154.94 cw(c-2795.24,-154.94) P12.1@-2819.75,-130.3 ; P12.1@-2830,-120 -2830,-179 ; P12.1@-2812.7,-137.39 ccw(c-2771.31,-179) -2830,-179
LED_1红: P1.3 R1.2 U9.22 | length 3466.7
  Top Layer w10: U9.22@-4017.34,-1587.54 ccw(c-4059.21,-1545.67) -4000,-1545.67 ccw(c-3940.79,-1545.67) U9.22@-3982.66,-1587.54 ; U9.22@-4010.27,-1594.61 ccw(c-4035.07,-1569.81) -4000,-1569.81 ccw(c-3964.93,-1569.81) U9.22@-3989.73,-1594.61 ; U9.22@-4000,-1604.88 -4000,-1463 -3979,-1442 -2527,-1442 -2409,-1560 P1.3@-2260,-1560 -2260,-829 -2232.9,-801.9 R1.2@-1975,-801.9 ; P1.3@-2277.34,-1577.34 ccw(c-2319.21,-1619.21) -2319.21,-1560 ccw(c-2319.21,-1500.79) -2277.34,-1542.66 ccw(c-2319.21,-1500.79) -2260,-1500.79 ccw(c-2200.79,-1500.79) P1.3@-2242.66,-1542.66 ; P1.3@-2270.27,-1570.27 ccw(c-2295.07,-1595.07) -2295.07,-1560 ccw(c-2295.07,-1524.93) -2270.27,-1549.73 ccw(c-2295.07,-1524.93) -2260,-1524.93 ccw(c-2224.93,-1524.93) P1.3@-2249.73,-1549.73 ; R1.2@-1987.35,-812.28 ccw(c-2012.42,-837.35) -2012.42,-801.9 ccw(c-2012.42,-766.45) R1.2@-1987.35,-791.51
LED_1绿: P1.1 R2.2 U9.21 | length 3621.1
  Top Layer w10: U9.21@-3917.34,-1587.54 ccw(c-3959.21,-1545.67) -3900,-1545.67 ccw(c-3840.79,-1545.67) U9.21@-3882.66,-1587.54 ; U9.21@-3910.27,-1594.61 ccw(c-3935.07,-1569.81) -3900,-1569.81 ccw(c-3864.93,-1569.81) U9.21@-3889.73,-1594.61 ; U9.21@-3900,-1604.88 -3900,-1478 -3880,-1458 -2533.63,-1458 -2440,-1551.63 -2440,-1611 -2414,-1637 -2081,-1637 -2060,-1616 ; P1.1@-2077.34,-1542.66 ccw(c-2119.21,-1500.79) -2060,-1500.79 ccw(c-2000.79,-1500.79) P1.1@-2042.66,-1542.66 ; P1.1@-2076.63,-1578.03 cw(c-2111.66,-1616) -2060,-1616 ; P1.1@-2070.27,-1549.73 ccw(c-2095.07,-1524.93) -2060,-1524.93 ccw(c-2024.93,-1524.93) P1.1@-2049.73,-1549.73 ; P1.1@-2069.85,-1570.68 cw(c-2090.6,-1593.17) -2060,-1593.17 cw(c-2029.4,-1593.17) P1.1@-2050.15,-1570.68 ; P1.1@-2043.37,-1578.03 ccw(c-2008.34,-1616) -2060,-1616 ; R2.2@-1987.35,-932.28 ccw(c-2012.42,-957.35) -2012.42,-921.9 ccw(c-2012.42,-886.45) R2.2@-1987.35,-911.51 ; R2.2@-1975,-921.9 -2188.9,-921.9 -2211,-944 -2211,-1347 -2178,-1380 -2074,-1380 -2060,-1394 P1.1@-2060,-1560 -2060,-1616
LED_2红: P2.3 R3.2 U9.20 | length 4045.3
  Top Layer w10: U9.20@-3817.34,-1587.54 ccw(c-3859.21,-1545.67) -3800,-1545.67 ccw(c-3740.79,-1545.67) U9.20@-3782.66,-1587.54 ; U9.20@-3810.27,-1594.61 ccw(c-3835.07,-1569.81) -3800,-1569.81 ccw(c-3764.93,-1569.81) U9.20@-3789.73,-1594.61 ; U9.20@-3800,-1604.88 -3800,-1496 -3778,-1474 -2540.25,-1474 -2456,-1558.25 -2456,-1891 -2407,-1940 P2.3@-2260,-1940 -2260,-1716 -2229,-1685 -2020,-1685 -1997,-1662 -1997,-1390 -2023,-1364 -2163,-1364 -2195,-1332 -2195,-1066 -2170.9,-1041.9 R3.2@-1975,-1041.9 ; P2.3@-2277.34,-1957.34 ccw(c-2319.21,-1999.21) -2319.21,-1940 ccw(c-2319.21,-1880.79) -2277.34,-1922.66 ccw(c-2319.21,-1880.79) -2260,-1880.79 ccw(c-2200.79,-1880.79) P2.3@-2242.66,-1922.66 ; P2.3@-2270.27,-1950.27 ccw(c-2295.07,-1975.07) -2295.07,-1940 ccw(c-2295.07,-1904.93) -2270.27,-1929.73 ccw(c-2295.07,-1904.93) -2260,-1904.93 ccw(c-2224.93,-1904.93) P2.3@-2249.73,-1929.73 ; R3.2@-1987.35,-1052.28 ccw(c-2012.42,-1077.35) -2012.42,-1041.9 ccw(c-2012.42,-1006.45) R3.2@-1987.35,-1031.51
LED_2绿: P2.1 R4.2 U9.19 | length 3596.1
  Top Layer w10: U9.19@-3717.34,-1587.54 ccw(c-3759.21,-1545.67) -3700,-1545.67 ccw(c-3640.79,-1545.67) U9.19@-3682.66,-1587.54 ; U9.19@-3710.27,-1594.61 ccw(c-3735.07,-1569.81) -3700,-1569.81 ccw(c-3664.93,-1569.81) U9.19@-3689.73,-1594.61 ; U9.19@-3700,-1604.88 -3700,-1509 -3681,-1490 -2546.88,-1490 -2472,-1564.88 -2472,-1983 -2441,-2014 -2081,-2014 -2060,-1993 ; P2.1@-2075.87,-1958.7 cw(c-2104.99,-1993) -2060,-1993 ; P2.1@-2069.4,-1951.07 cw(c-2086.65,-1971.39) -2060,-1971.39 cw(c-2033.35,-1971.39) P2.1@-2050.6,-1951.07 ; P2.1@-2049.73,-1950.27 cw(c-2024.93,-1975.07) -2024.93,-1940 cw(c-2024.93,-1904.93) P2.1@-2049.73,-1929.73 ; P2.1@-2044.13,-1958.7 ccw(c-2015.01,-1993) -2060,-1993 ; P2.1@-2042.66,-1957.34 cw(c-2000.79,-1999.21) -2000.79,-1940 cw(c-2000.79,-1880.79) P2.1@-2042.66,-1922.66 ; R4.2@-1985.38,-1172.28 cw(c-2010.45,-1197.35) -1975,-1197.35 cw(c-1939.55,-1197.35) R4.2@-1964.62,-1172.28 ; R4.2@-1975,-1161.9 -1975,-1922 -1993,-1940 P2.1@-2060,-1940 -2060,-1993
LED_3红: P3.3 R5.2 U9.18 | length 4758.5
  Top Layer w10: U9.18@-3617.34,-1587.54 ccw(c-3659.21,-1545.67) -3600,-1545.67 ccw(c-3540.79,-1545.67) U9.18@-3582.66,-1587.54 ; U9.18@-3610.27,-1594.61 ccw(c-3635.07,-1569.81) -3600,-1569.81 ccw(c-3564.93,-1569.81) U9.18@-3589.73,-1594.61 ; U9.18@-3600,-1604.88 -3600,-1527 -3579,-1506 -2553.51,-1506 -2488,-1571.51 -2488,-1989.63 -2447.63,-2030 -1993,-2030 -1959,-1996 -1959,-1593 -1926,-1560 P3.3@-1500,-1560 -1500,-1501 ; R5.2@-1667.35,-812.28 ccw(c-1692.42,-837.35) -1692.42,-801.9 ccw(c-1692.42,-766.45) R5.2@-1667.35,-791.51 ; R5.2@-1655,-801.9 -1791.9,-801.9 -1817,-827 -1817,-1428.63 -1770.63,-1475 -1526,-1475 -1500,-1501 ; P3.3@-1517.34,-1577.34 ccw(c-1559.21,-1619.21) -1559.21,-1560 ccw(c-1559.21,-1500.79) P3.3@-1517.34,-1542.66 ; P3.3@-1517.3,-1542.61 ccw(c-1558.69,-1501) -1500,-1501 ; P3.3@-1510.27,-1570.27 ccw(c-1535.07,-1595.07) -1535.07,-1560 ccw(c-1535.07,-1524.93) P3.3@-1510.27,-1549.73 ; P3.3@-1510.25,-1549.7 ccw(c-1534.76,-1525.06) -1500,-1525.06 ccw(c-1465.24,-1525.06) P3.3@-1489.75,-1549.7 ; P3.3@-1482.7,-1542.61 cw(c-1441.31,-1501) -1500,-1501
LED_3绿: P3.1 R6.2 U9.17 | length 4908.5
  Top Layer w10: U9.17@-3517.34,-1587.54 ccw(c-3559.21,-1545.67) -3500,-1545.67 ccw(c-3440.79,-1545.67) U9.17@-3482.66,-1587.54 ; U9.17@-3510.27,-1594.61 ccw(c-3535.07,-1569.81) -3500,-1569.81 ccw(c-3464.93,-1569.81) U9.17@-3489.73,-1594.61 ; U9.17@-3500,-1604.88 -3500,-1536 -3486,-1522 -2560.14,-1522 -2504,-1578.14 -2504,-1996.25 -2454.25,-2046 -1986.37,-2046 -1943,-2002.63 -1943,-1669 -1910,-1636 -1311,-1636 -1300,-1625 P3.1@-1300,-1560 -1300,-1484 -1325,-1459 -1764,-1459 -1801,-1422 -1801,-942 -1780.9,-921.9 R6.2@-1655,-921.9 ; R6.2@-1667.35,-932.28 ccw(c-1692.42,-957.35) -1692.42,-921.9 ccw(c-1692.42,-886.45) R6.2@-1667.35,-911.51 ; P3.1@-1317.34,-1577.34 cw(c-1359.21,-1619.21) -1300,-1619.21 cw(c-1240.79,-1619.21) P3.1@-1282.66,-1577.34 ; P3.1@-1317.34,-1542.66 ccw(c-1359.21,-1500.79) -1300,-1500.79 ccw(c-1240.79,-1500.79) P3.1@-1282.66,-1542.66 ; P3.1@-1310.27,-1570.27 cw(c-1335.07,-1595.07) -1300,-1595.07 cw(c-1264.93,-1595.07) P3.1@-1289.73,-1570.27 ; P3.1@-1310.27,-1549.73 ccw(c-1335.07,-1524.93) -1300,-1524.93 ccw(c-1264.93,-1524.93) P3.1@-1289.73,-1549.73
LED_4红: P4.3 R7.2 U9.16 | length 4816
  Top Layer w10: U9.16@-3414.98,-1585.46 ccw(c-3438.45,-1555) -3400,-1555 ; U9.16@-3408.87,-1593.38 ccw(c-3422.78,-1575.34) -3400,-1575.34 ccw(c-3377.22,-1575.34) U9.16@-3391.13,-1593.38 ; U9.16@-3400,-1604.88 -3400,-1555 ; U9.16@-3385.02,-1585.46 cw(c-3361.55,-1555) -3400,-1555 ; R7.2@-1667.35,-1052.28 ccw(c-1692.42,-1077.35) -1692.42,-1041.9 ccw(c-1692.42,-1006.45) R7.2@-1667.35,-1031.51 ; R7.2@-1655,-1041.9 -1756.9,-1041.9 -1785,-1070 -1785,-1415.37 -1757.37,-1443 -1227,-1443 -1198,-1472 -1198,-1755 -1222,-1779 -1472,-1779 -1500,-1807 P4.3@-1500,-1940 -1500,-2018 -1544,-2062 -2460.88,-2062 -2520,-2002.88 -2520,-1584.76 -2566.76,-1538 -3383,-1538 -3400,-1555 ; P4.3@-1517.34,-1957.34 cw(c-1559.21,-1999.21) -1500,-1999.21 cw(c-1440.79,-1999.21) P4.3@-1482.66,-1957.34 ; P4.3@-1517.34,-1922.66 ccw(c-1559.21,-1880.79) -1500,-1880.79 ccw(c-1440.79,-1880.79) P4.3@-1482.66,-1922.66 ; P4.3@-1510.27,-1950.27 cw(c-1535.07,-1975.07) -1500,-1975.07 cw(c-1464.93,-1975.07) P4.3@-1489.73,-1950.27 ; P4.3@-1510.27,-1929.73 ccw(c-1535.07,-1904.93) -1500,-1904.93 ccw(c-1464.93,-1904.93) P4.3@-1489.73,-1929.73
LED_4绿: P4.1 R8.2 U9.15 | length 4376.1
  Top Layer w10: U9.15@-3300,-1604.88 -3300,-1572 -3282,-1554 ; U9.15@-3296.74,-1601.74 cw(c-3279.59,-1585.24) -3296.42,-1568.42 ; U9.15@-3289.53,-1594.81 cw(c-3272.24,-1578.17) -3289.21,-1561.21 ; U9.15@-3282.33,-1587.87 cw(c-3264.9,-1571.1) -3282,-1554 ; R8.2@-1665.38,-1172.28 cw(c-1690.45,-1197.35) -1655,-1197.35 cw(c-1619.55,-1197.35) R8.2@-1644.62,-1172.28 ; R8.2@-1655,-1161.9 -1655,-1397 -1625,-1427 -1220.37,-1427 -1182,-1465.37 -1182,-1761.63 -1215.37,-1795 -1280,-1795 -1300,-1815 P4.1@-1300,-1940 -1300,-2037 -1341,-2078 -2467.51,-2078 -2536,-2009.51 -2536,-1594 -2576,-1554 -3282,-1554 ; P4.1@-1317.34,-1957.34 cw(c-1359.21,-1999.21) -1300,-1999.21 cw(c-1240.79,-1999.21) P4.1@-1282.66,-1957.34 ; P4.1@-1317.34,-1922.66 ccw(c-1359.21,-1880.79) -1300,-1880.79 ccw(c-1240.79,-1880.79) P4.1@-1282.66,-1922.66 ; P4.1@-1310.27,-1950.27 cw(c-1335.07,-1975.07) -1300,-1975.07 cw(c-1264.93,-1975.07) P4.1@-1289.73,-1950.27 ; P4.1@-1310.27,-1929.73 ccw(c-1335.07,-1904.93) -1300,-1904.93 ccw(c-1264.93,-1904.93) P4.1@-1289.73,-1929.73
LED_GREED: P7.1 P11.32 | length 3329
  Top Layer w10: P11.32@-4136.28,-204.74 ccw(c-4178.15,-162.87) -4118.93,-162.87 ccw(c-4059.72,-162.87) P11.32@-4101.59,-204.74 ; P11.32@-4129.21,-211.81 ccw(c-4154.01,-187.01) -4118.93,-187.01 ccw(c-4083.86,-187.01) P11.32@-4108.66,-211.81 ; P11.32@-4118.93,-222.08 -4118.93,-138.93 -4093,-113 -3353,-113 -3322,-144 -3322,-223 -3277.77,-267.23 P7.1@-1163.49,-267.23 ; P7.1@-1167.47,-271.21 ccw(c-1177.08,-280.82) -1177.08,-267.23 ccw(c-1177.08,-253.64) P7.1@-1167.47,-263.25
LED_RED: P7.3 P11.33 | length 3169.4
  Top Layer w10: P11.33@-4018.93,-322.08 -1080.07,-322.08 -1064.99,-307 P7.3@-1064.99,-267.23 ; P11.33@-4008.66,-332.36 cw(c-3983.86,-357.16) -3983.86,-322.08 cw(c-3983.86,-287.01) P11.33@-4008.66,-311.81 ; P11.33@-4001.59,-339.43 cw(c-3959.72,-381.3) -3959.72,-322.08 cw(c-3959.72,-262.87) P11.33@-4001.59,-304.74 ; P7.3@-1068.97,-294.05 cw(c-1078.58,-303.66) -1064.99,-303.66 cw(c-1051.4,-303.66) P7.3@-1061.01,-294.05